# Altium PCB PCB3.PcbDoc
Units mm, origin at the board's own origin, x right, y up, seen from the top; angles counter-clockwise.
Board outline 47.09 x 58.17 mm, 2 copper layers (Top Layer, Bottom Layer); 73 components, 59 nets, 332 pads, 45 vias.
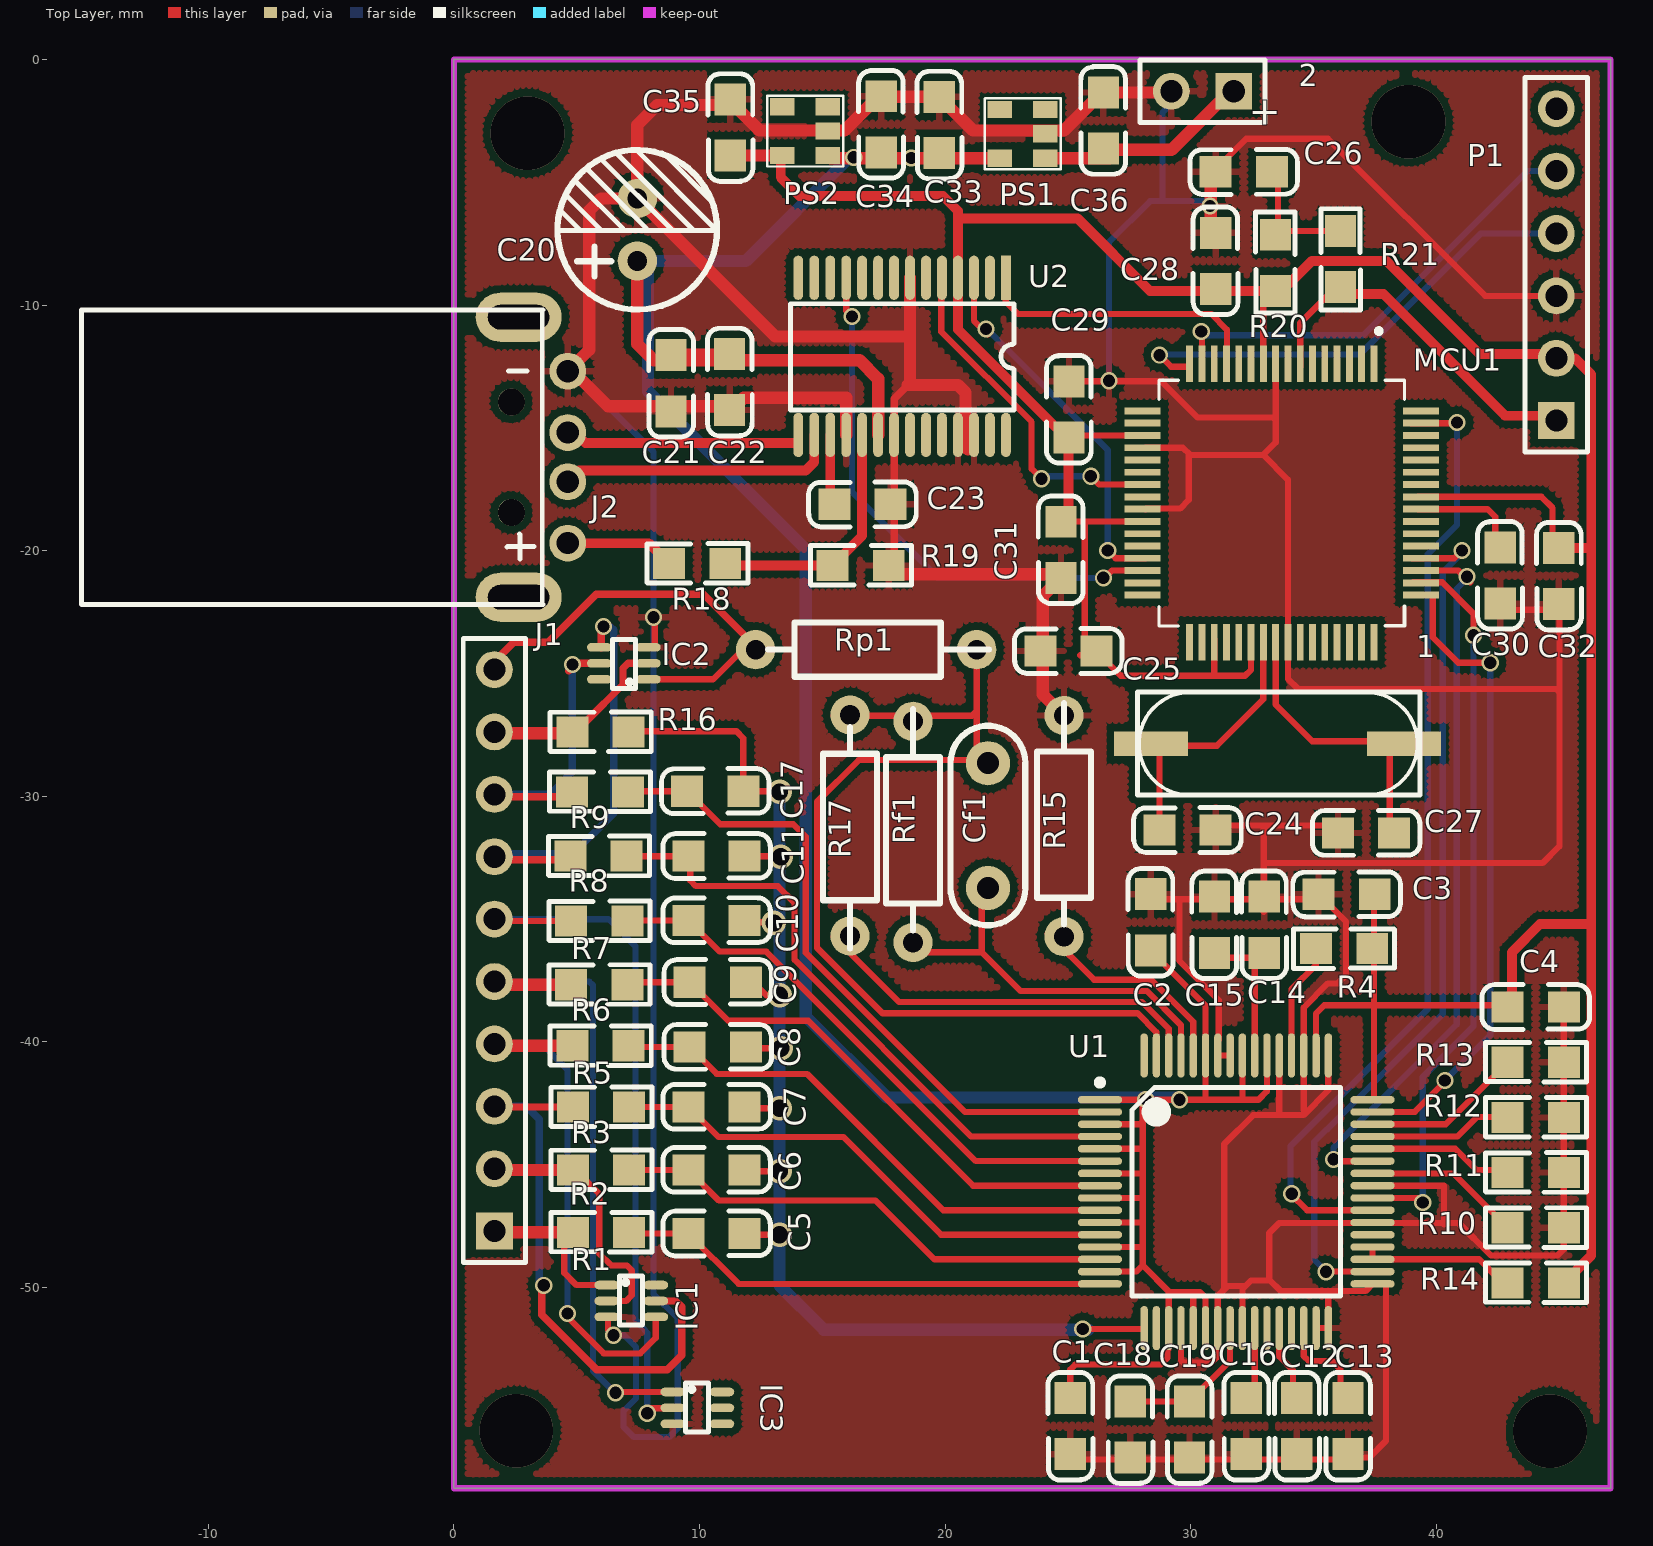
[diagram p0: Top Layer view]
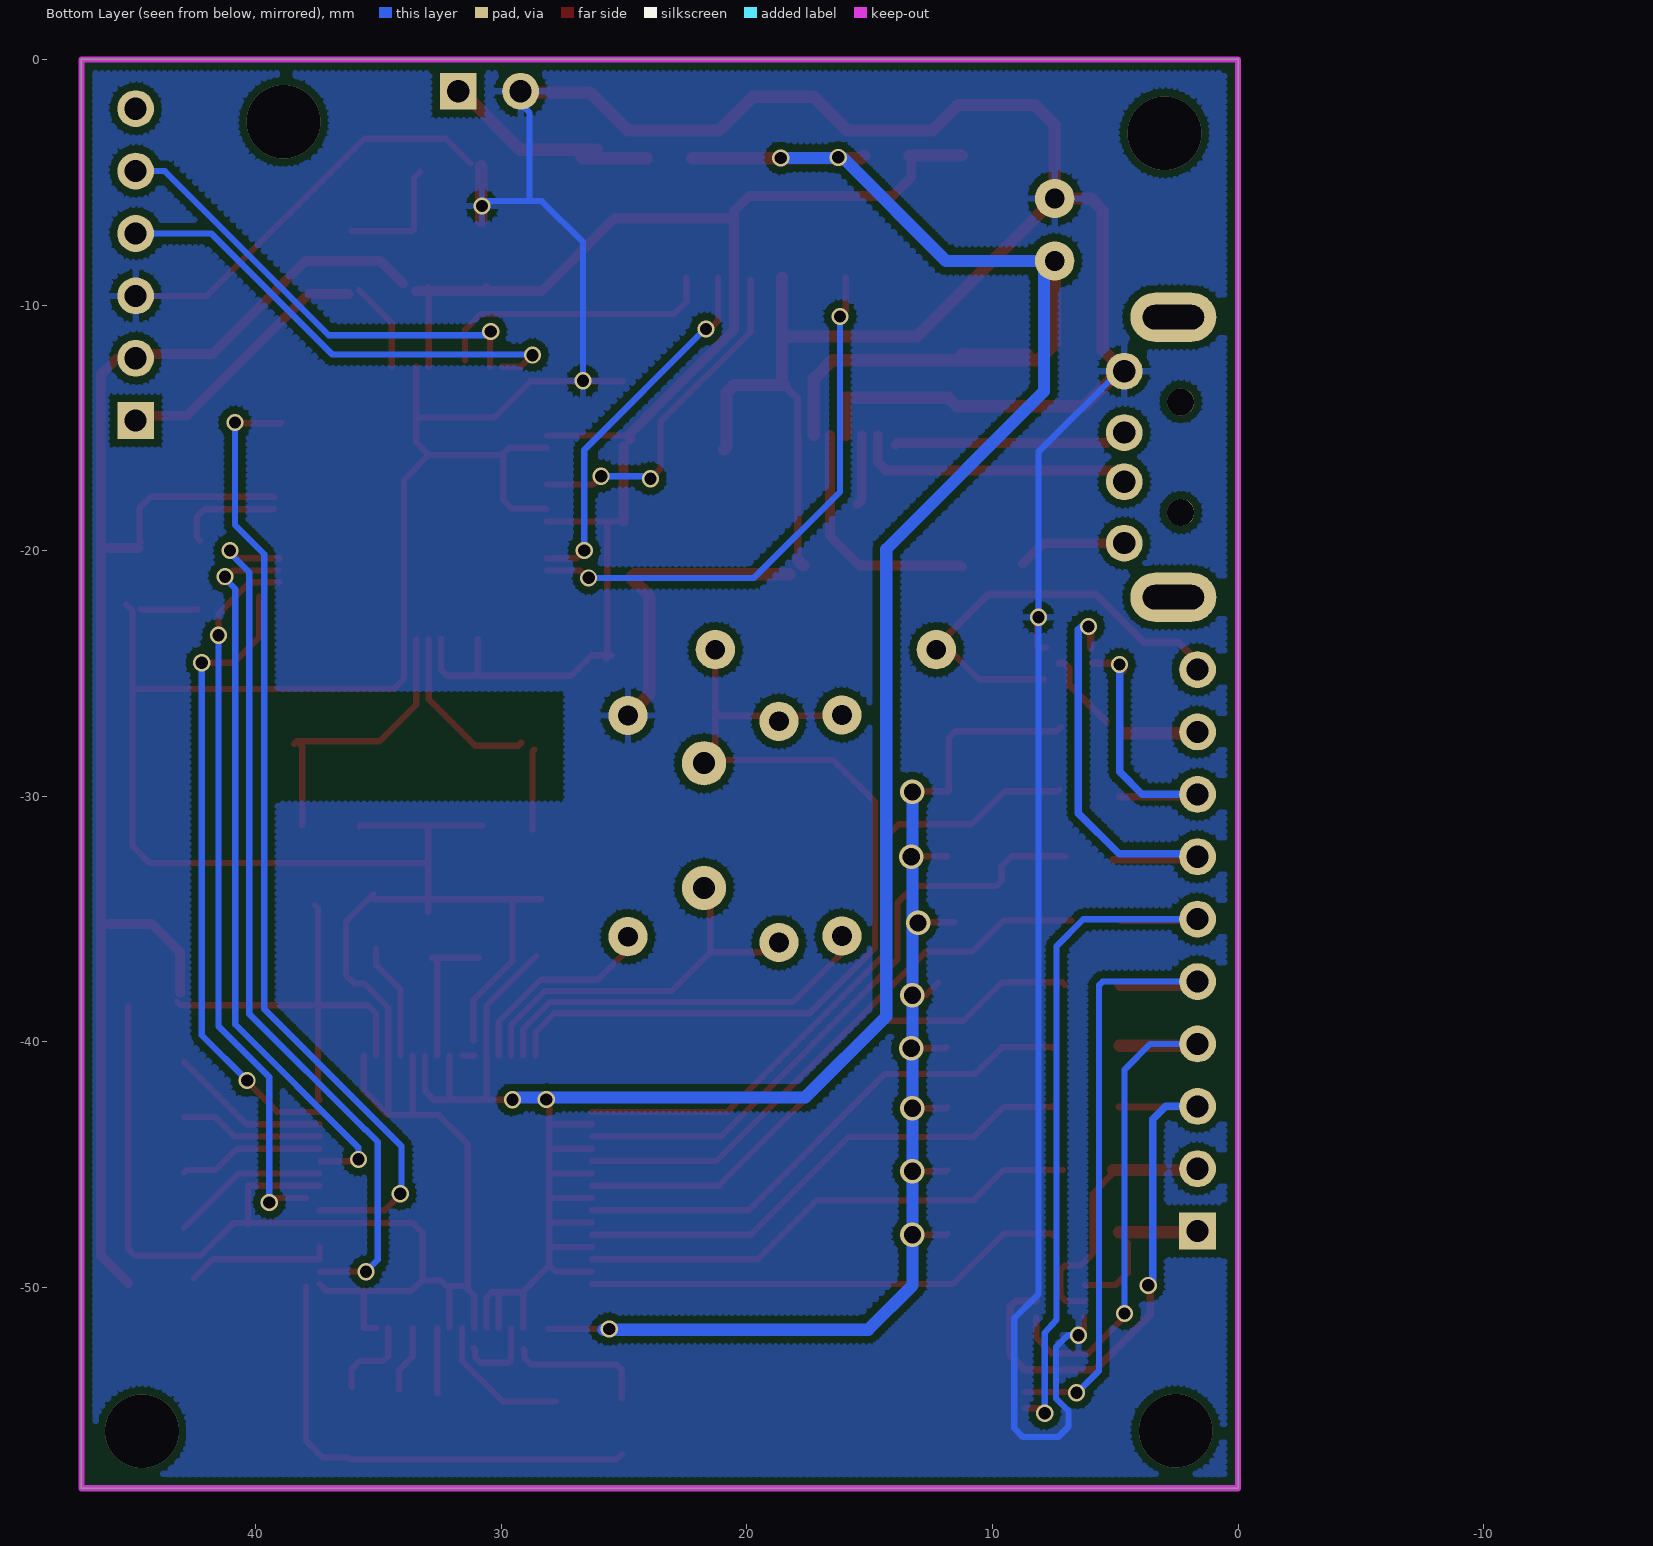
[diagram p1: Bottom Layer view, seen from below]

## Layer stack, top to bottom
Top Layer: signal copper 0.0356
Dielectric: dielectric 0.32, FR-4, Dk 4.8
Bottom Layer: signal copper 0.0356

## Board outline
0,0 46.863,0 47.092,0 47.092,-58.166 0,-58.166

## Design rules (kind name [scope] priority, off if disabled: settings)
Clearance Clearance_1 [(InPolygon)] p1: gap=0.3
Clearance [All] p2: gap=0.2
ComponentClearance [All] p1 off: gap=0.254 collisioncheckmode=3 verticalgap=0.254
PolygonConnect [All] p1: connectstyle=Relief reliefconductorwidth=0.254 reliefentries=4 polygonreliefangle="90 Angle"
RoomDefinition ADS1299 [InComponentClass('ADS1299')] p1: confinementstyle=ConfineOut formatcopy=TRUE lockcomponents=FALSE outline 16.662,-82.347 36.601,-82.347 36.601,-64.567 16.662,-64.567
RoomDefinition MCU [InComponentClass('MCU')] p2: confinementstyle=ConfineOut formatcopy=TRUE lockcomponents=FALSE outline -7.595,-84.633 12.852,-84.633 12.852,-61.773 -7.595,-61.773
RoomDefinition Power [InComponentClass('Power')] p3: confinementstyle=ConfineOut formatcopy=TRUE lockcomponents=FALSE outline 37.998,-75.87 66.573,-75.87 66.573,-69.012 37.998,-69.012
RoutingVias [All] p1: holewidth=0.711 width=1.27 viastyle="Through Hole" minholewidth=0.3 minwidth=0.3 maxholewidth=4 maxwidth=4
SolderMaskExpansion [All] p1: expansion=0.102
TestPointUsage [All] p1: valid=0 allowmultiple=FALSE
Testpoint [All] p1: side=15 testpointundercomponent=TRUE minsize=1.016 maxsize=2.54 preferedsize=1.524 minholesize=0 maxholesize=1.016 preferedholesize=0.813 testpointgrid=0.025 style=1023 order=0-112345678
Width [All] p1: maxlimit=3 minlimit=0.254 preferedwidth=0.254 minimp=50.000000 maximp=50.000000 favimp=50.000000
18 further rules are at their usual default settings.

## Classes and differential pairs
component class ADS1299: C1 C2 C3 C4 C5 C6 C7 C8 C9 C10 C11 C12 C13 C14 C15 C16 C17 C18 C19 Cf1 IC1 IC2 IC3 J1 R1 R2 R3 R4 R5 R6 R7 R8 R9 R10 R11 R12 R13 R14 R15 R16 R17 Rf1 Rp1 U1
component class MCU: 1 C20 C21 C22 C23 C24 C25 C26 C27 C28 C29 C30 C31 C32 J2 MCU1 P1 R18 R19 R20 R21 U2
component class Power: 2 C33 C34 C35 C36 PS1 PS2

## Components (designator, comment, footprint, x,y, rotation, side; value= is the part's Value field where it differs from the comment)
1 "ECS-250-18-5PX-F-TR" XTAL/S 30.35,-28.396 r0 top
2 "Battery" BAT-2 30.48,-1.295 r180 top
C1 "Cap Semi" 0805c 25.095,-56.783 r90 top
C2 "Cap Semi" 0805c 28.372,-33.985 r270 top
C3 "Cap Semi" 0805c 35.204,-33.985 r0 top
C4 "Cap Semi" 0805c 45.187,-38.583 r180 top
C5 "Cap Semi" 0805c 11.836,-47.803 r180 top
C6 "Cap Semi" 0805c 11.836,-45.212 r180 top
C7 "Cap Semi" 0805c 11.836,-42.647 r180 top
C8 "Cap Semi" 0805c 11.887,-40.208 r180 top
C9 "Cap Semi" 0805c 11.887,-37.567 r180 top
C10 "Cap Semi" 0805c 11.836,-35.052 r180 top
C11 "Cap Semi" 0805c 11.836,-32.436 r180 top
C12 "Cap Semi" 0805c 34.315,-56.783 r90 top
C13 "Cap Semi" 0805c 36.398,-56.783 r90 top
C14 "Cap Semi" 0805c 32.995,-34.087 r270 top
C15 "Cap Semi" 0805c 30.963,-34.087 r270 top
C16 "Cap Semi" 0805c 32.258,-56.783 r90 top
C17 "Cap Semi" 0805c 11.786,-29.794 r180 top
C18 "Cap Semi" 0805c 27.534,-56.921 r90 top
C19 "Cap Semi" 0805c 29.947,-56.921 r90 top
C20 "Cap Pol2" φ6.5-1 7.468,-8.204 r90 top
C21 "Cap Semi" 0805c 8.839,-14.326 r90 top
C22 "Cap Semi" 0805c 11.227,-14.275 r90 top
C23 "Cap Semi" 0805c 15.494,-18.11 r0 top
C24 "Cap Semi" 0805c 28.727,-31.369 r0 top
C25 "Cap Semi" 0805c 23.876,-24.079 r0 top
C26 "Cap Semi" 0805c 31.013,-4.572 r0 top
C27 "Cap Semi" 0805c 38.278,-31.496 r180 top
C28 "Cap Semi" 0805c 31.013,-7.061 r270 top
C29 "Cap Semi" 0805c 25.044,-13.106 r270 top
C30 "Cap Semi" 0805c 42.596,-19.863 r270 top
C31 "Cap Semi" 0805c 24.714,-18.821 r270 top
C32 "Cap Semi" 0805c 44.983,-22.174 r90 top
C33 "Cap Semi" 0805c 19.761,-3.81 r90 top
C34 "Cap Semi" 0805c 17.399,-1.499 r270 top
C35 "Cap Semi" 0805c 11.252,-3.912 r90 top
C36 "Cap Semi" 0805c 26.441,-1.346 r270 top
Cf1 "Cap" 102 21.742,-28.651 r90 top
IC1 "TPD4E1B06DCKR" SOT363 6.223,-49.896 r270 top
IC2 "TPD4E1B06DCKR" SOT363 7.918,-25.237 r90 top
IC3 "TPD4E1B06DCKR" SOT363 8.915,-54.25 r270 top
J1 "MMS-110-01-T-SV" HDR1X10 1.651,-47.701 r90 top
J2 "629004113921" USB-公头 3.487,-16.195 r180 top
MCU1 "PIC32MX470F512H-I/PT" *QFP50P1200X1200X120-64N 33.706,-18.059 r270 top locked
P1 "Header 6" HDR1X6 44.882,-14.707 r90 top
PS1 "MCP1754T-3302E_OT" SOT23-5 23.153,-3.034 r90 top
PS2 "MCP1754T-3302E_OT" SOT23-5 14.3,-2.921 r90 top
R1 "Res3" 0805 7.137,-47.752 r180 top
R2 "Res3" 0805 7.137,-45.212 r180 top
R3 "Res3" 0805 7.137,-42.647 r180 top
R4 "Res3" 0805 35.103,-36.195 r0 top
R5 "Res3" 0805 7.112,-40.157 r180 top
R6 "Res3" 0805 7.061,-37.668 r180 top
R7 "Res3" 0805 7.061,-35.077 r180 top
R8 "Res3" 0805 7.036,-32.436 r180 top
R9 "Res3" 0805 7.087,-29.82 r180 top
R10 "Res3" 0805 45.187,-47.564 r180 top
R11 "Res3" 0805 45.187,-45.319 r180 top
R12 "Res3" 0805 45.187,-43.073 r180 top
R13 "Res3" 0805 45.187,-40.828 r180 top
R14 "Res3" 0805 45.187,-49.809 r180 top
R15 "Res1" "RB0.4    &9" 24.841,-26.712 r270 top
R16 "Res3" 0805 7.112,-27.381 r180 top
R17 "Res1" "RB0.4    &9" 16.129,-35.687 r90 top
R18 "Res3" 0805 11.049,-20.523 r180 top
R19 "Res3" 0805 17.704,-20.599 r180 top
R20 "Res3" 0805 33.452,-7.137 r270 top
R21 "Res3" 0805 36.093,-9.271 r90 top
Rf1 "Res1" "RB0.4    &9" 18.694,-26.949 r270 top
Rp1 "Res1" "RB0.4    &9" 21.285,-24.028 r180 top
U1 "ADS1299IPAGR" TQFP64_N 31.852,-46.101 r0 top
U2 "FT232RL-Tray" SSOP-28 22.472,-8.89 r180 top

## Footprints (in the part's own frame and the unit in brackets; to place one, negate y for a bottom-side part, rotate by r counter-clockwise, add the part's x,y. Pads: shape width x height; smd on the part's side, far side on the other; paste and mask are expansions set on the pad)
102 [mm]
  round 1.8 hole 0.9: 1(0,0) 2(-5.08,0)
  silkscreen extent -6.6,-1.52 1.52,1.52
0805 [mm] "Chip Resistor; Body 2.0 x 1.3 mm (LxW typ)"
  rect 1.3x1.27 smd: 1(0,0) 2(2.286,0)
  silkscreen extent -0.92,-0.81 3.19,0.8
0805c [mm]
  rect 1.3x1.27 smd: 1(0,0) 2(2.286,0)
  silkscreen extent -1.05,-0.92 3.33,0.91
*QFP50P1200X1200X120-64N [mm]
  rect 1.47x0.28 smd: 1(-5.67,3.75) 2(-5.67,3.25) 3(-5.67,2.75) 4(-5.67,2.25) 5(-5.67,1.75) 6(-5.67,1.25) 7(-5.67,0.75) 8(-5.67,0.25) 9(-5.67,-0.25) 10(-5.67,-0.75) 11(-5.67,-1.25) 12(-5.67,-1.75) 13(-5.67,-2.25) 14(-5.67,-2.75) 15(-5.67,-3.25) 16(-5.67,-3.75) 33(5.67,-3.75) 34(5.67,-3.25) 35(5.67,-2.75) 36(5.67,-2.25) 37(5.67,-1.75) 38(5.67,-1.25) 39(5.67,-0.75) 40(5.67,-0.25) 41(5.67,0.25) 42(5.67,0.75) 43(5.67,1.25) 44(5.67,1.75) 45(5.67,2.25) 46(5.67,2.75) 47(5.67,3.25) 48(5.67,3.75)
  rect 0.28x1.47 smd: 17(-3.75,-5.67) 18(-3.25,-5.67) 19(-2.75,-5.67) 20(-2.25,-5.67) 21(-1.75,-5.67) 22(-1.25,-5.67) 23(-0.75,-5.67) 24(-0.25,-5.67) 25(0.25,-5.67) 26(0.75,-5.677) 27(1.25,-5.67) 28(1.75,-5.67) 29(2.25,-5.67) 30(2.75,-5.67) 31(3.25,-5.67) 32(3.75,-5.67) 49(3.75,5.67) 50(3.25,5.67) 51(2.75,5.67) 52(2.25,5.67) 53(1.75,5.67) 54(1.25,5.67) 55(0.75,5.67) 56(0.25,5.67) 57(-0.25,5.67) 58(-0.75,5.67) 59(-1.25,5.67) 60(-1.75,5.67) 61(-2.25,5.67) 62(-2.75,5.67) 63(-3.25,5.67) 64(-3.75,5.67)
  silkscreen extent -7.1,-5 5,5
BAT-2 [mm] "Multicell Battery; 2 Leads"
  rect 1.5x1.5 hole 0.9: 1(-1.27,0)
  round 1.5 hole 0.9: 2(1.27,0)
  silkscreen extent -2.54,-1.27 2.54,1.27
HDR1X6 [mm]
  rect 1.5x1.5 hole 0.9: 1(0,0)
  round 1.5 hole 0.9: 2(2.54,0) 3(5.08,0) 4(7.62,0) 5(10.16,0) 6(12.7,0)
  silkscreen extent -1.27,-1.27 13.97,1.27
HDR1X10 [mm]
  rect 1.5x1.5 hole 0.9: 1(0,0)
  round 1.5 hole 0.9: 2(2.54,0) 3(5.08,0) 4(7.62,0) 5(10.16,0) 6(12.7,0) 7(15.24,0) 8(17.78,0) 9(20.32,0) 10(22.86,0)
  silkscreen extent -1.27,-1.27 24.13,1.27
"RB0.4    &9" [mm]
  round 1.6 hole 0.8: 1(0,0) 2(9,0)
  silkscreen extent -0.5,-1.1 8.5,1.1
SOT23-5 [mm]
  rect 0.7x1 smd: 1(-0.99,-0.924) 2(0.011,-0.926) 3(0.99,-0.924) 4(0.99,0.927) 5(-0.99,0.927)
  silkscreen extent -1.44,-1.56 1.45,1.53
SOT363 [mm]
  oval 0.35x1 smd: 1(0,0) 2(0.65,0) 3(1.3,0) 4(1.3,2) 5(0.65,2) 6(0,2)
  silkscreen extent -0.37,0.52 1.63,1.46
SSOP-28 [mm]
  rect 0.4x1.8 smd: 1(0,0)
  oval 0.4x1.8 smd: 2(0.65,0) 3(1.3,0) 4(1.95,0) 5(2.6,0) 6(3.25,0) 7(3.9,0) 8(4.55,0) 9(5.2,0) 10(5.85,0) 11(6.5,0) 12(7.15,0) 13(7.8,0) 14(8.45,0) 15(8.45,6.4) 16(7.8,6.4) 17(7.15,6.4) 18(6.5,6.4) 19(5.85,6.4) 20(5.2,6.4) 21(4.55,6.4) 22(3.9,6.4) 23(3.25,6.4) 24(2.6,6.4) 25(1.95,6.4) 26(1.3,6.4) 27(0.65,6.4) 28(0,6.4)
  silkscreen extent -0.32,1.06 8.78,5.38
TQFP64_N [mm]
  oval 1.8x0.3 smd: 1(-5.55,3.75) 2(-5.55,3.25) 3(-5.55,2.75) 4(-5.55,2.25) 5(-5.55,1.75) 6(-5.55,1.25) 7(-5.55,0.75) 8(-5.55,0.25) 9(-5.55,-0.25) 10(-5.55,-0.75) 11(-5.55,-1.25) 12(-5.55,-1.75) 13(-5.55,-2.25) 14(-5.55,-2.75) 15(-5.55,-3.25) 16(-5.55,-3.75) 33(5.55,-3.75) 34(5.55,-3.25) 35(5.55,-2.75) 36(5.55,-2.25) 37(5.55,-1.75) 38(5.55,-1.25) 39(5.55,-0.75) 40(5.55,-0.25) 41(5.55,0.25) 42(5.55,0.75) 43(5.55,1.25) 44(5.55,1.75) 45(5.55,2.25) 46(5.55,2.75) 47(5.55,3.25) 48(5.55,3.75)
  oval 0.3x1.8 smd: 17(-3.75,-5.55) 18(-3.25,-5.55) 19(-2.75,-5.55) 20(-2.25,-5.55) 21(-1.75,-5.55) 22(-1.25,-5.55) 23(-0.75,-5.55) 24(-0.25,-5.55) 25(0.25,-5.55) 26(0.75,-5.55) 27(1.25,-5.55) 28(1.75,-5.55) 29(2.25,-5.55) 30(2.75,-5.55) 31(3.25,-5.55) 32(3.75,-5.55) 49(3.75,5.55) 50(3.25,5.55) 51(2.75,5.55) 52(2.25,5.55) 53(1.75,5.55) 54(1.25,5.55) 55(0.75,5.55) 56(0.25,5.55) 57(-0.25,5.55) 58(-0.75,5.55) 59(-1.25,5.55) 60(-1.75,5.55) 61(-2.25,5.55) 62(-2.75,5.55) 63(-3.25,5.55) 64(-3.75,5.55)
  silkscreen extent -5.67,-4.25 4.25,4.57
USB-公头 [mm]
  oval 3.5x2 hole 1 slot 2.5 at 0 deg: 0(0.85,5.7) 0(0.85,-5.7)
  round 1.1 hole 1.1: 0(1.15,2.25) 0(1.15,-2.25)
  round 1.5 hole 0.9: 1(-1.15,3.5) 2(-1.15,1) 3(-1.15,-1) 4(-1.15,-3.5)
  silkscreen extent -0.15,-6 18.65,6
XTAL/S [mm]
  rect 3x1 smd: 1(8.334,0.532) 2(-1.966,0.532)
  silkscreen extent -2.52,-1.57 8.98,2.64
φ6.5-1 [mm]
  round 1.6 hole 0.8: 1(0,0) 2(2.54,0)
  silkscreen extent -1.98,-3.27 4.52,3.25

## Part data
1: library part CMP-2000-05725-1, "Low Profile Crystal, 14.7456 MHz, 18 pF, -20 to 70 degC, 2-Pin SMD, RoHS, Tape and Reel"
2: "Multicell Battery"
C1 C2 C3 C4 C5 C6 C7 C8 C9 C10 C11 C12 C13 C14 C15 C16 C17 C18 C19 C21 C22 C23 C24 C25 C26 C27 C28 C29 C30 C31 C32 C33 C34 C35 C36: "Capacitor (Semiconductor SIM Model)"
C20: "Polarized Capacitor (Axial)"
Cf1: "Capacitor"
IC1 IC2 IC3: "Integrated Circuit"
J1: library part CMP-1022-00092-1, "Tiger Claw(TM) Socket Strip, Through-hole, Vertical, -55 to 105 degC, 2 mm Pitch, 10-Pin, Female, RoHS"
J2: library part CMP-1502-03242-1, "USB 2.0 Type A Plug WR-COM, Horizontal, SMT, with Clips"
P1: "Header, 6-Pin"
PS1 PS2: "Power Supply"
R1 R2 R3 R4 R5 R6 R7 R8 R9 R10 R11 R12 R13 R14 R15 R16 R17 R18 R19 R20 R21 Rf1 Rp1: "Resistor"
U1: library part CMP-0841-00001-2, "Low-Noise, 8-Channel, 24-Bit Analog Front-End for Biopotential Measurement, 16 KSPS, -40 to 85 degC, 64-Pin PQFP (PAG-64), RoHS, Tape and Reel"
U2: library part CMP-0078-00027-1, "USB UART Asynchronous Serial Data Transfer Chip, SSOP-28, Tray"

## Via types
v1: diameter 0.7, hole 0.5, Top Layer to Bottom Layer, 33 vias
v2: diameter 1, hole 0.7, Top Layer to Bottom Layer, 8 vias
v3: diameter 3, hole 3, Top Layer to Bottom Layer, 4 vias

## Nets (pads, with @x,y where several pads share a name; then routed paths per layer and width w, separated by ;. In a path a pad name is that pad's centre, name@x,y a point inside that pad or via, vN(x,y) a via of type N, cw(c..) or ccw(c..) an arc to the next point about the centre after c; other vN are vias at no path point)
+3.3: C3.2 C4.2 C25.2 C28.2 C29.2 C31.1 C32.2 C35.1 MCU1.10 MCU1.19 MCU1.26 MCU1.35 MCU1.38 MCU1.57 P1.2 PS2.5 R4.2 R14.1 R20.2 U1.48 U1.50 U2.4 | length 147.5
  Top Layer w0.254: 20.379,-6.028 20.447,-6.096 ; C29.2@24.867,-15.367 24.924,-15.309 MCU1.19@28.156,-15.309 ; C31.1@25.273,-18.796 25.286,-18.809 MCU1.26@28.156,-18.809 ; 25.502,-24.257 26.314,-24.257 27.153,-25.095 32.207,-25.095 32.456,-24.847 MCU1.38@32.456,-23.609 ; 25.679,-18.809 25.679,-24.359 C25.2@25.73,-24.409 ; C28.2@30.607,-9.22 C28.2@30.658,-9.271 ; MCU1.35@30.956,-23.609 30.956,-25.063 30.988,-25.095 ; MCU1.10@32.956,-12.509 32.956,-9.284 R20.2@32.969,-9.271 ; U1.50 35.102,-38.838 35.433,-38.506 C4.2@42.901,-38.506 ; U1.48 37.465,-42.288 37.465,-34.544 C3.2@37.592,-34.417 ; MCU1.57@39.256,-17.809 44.276,-17.809 44.729,-18.263 44.729,-19.609 C32.2@44.679,-19.66 ; C4.2@43.053,-38.506 C4.2@43.205,-38.354
  Top Layer w0.4: PS2.5 13.31,-3.975 13.31,-4.801 14.072,-5.563 19.914,-5.563 20.379,-6.028 ; 20.447,-6.096 20.522,-6.171 20.522,-10.997 24.752,-15.227 C29.2@24.752,-15.481 ; 20.522,-6.477 25.4,-6.477 28.346,-9.423 R20.2@33.477,-9.423 ; C31.1@25.019,-18.821 C29.2@25.019,-15.748 ; R20.2@34.011,-9.119 34.925,-8.204 37.973,-8.204 41.758,-11.989 P1.2@44.882,-11.989 ; C4.2@43.053,-37.998 43.078,-37.973 43.078,-36.347 44.221,-35.204 46.304,-35.204 ; C32.2@44.755,-19.888 46.279,-19.888 46.304,-19.914 ; R14.1 46.304,-48.692 46.304,-12.827 45.644,-12.167
  Top Layer w0.5: C35.1 PS2.5
+5: C1.2 C2.2 C20.1 C21.2 C22.2 C33.1 C34.2 PS1.5 PS2.1 U1.1 U1.3 U1.5 U1.7 U1.9 U1.11 U1.13 U1.15 U1.19 U1.21 U1.22 U1.54 U1.56 U1.59 U2.20 | length 137.8
  Top Layer w0.254: C1.2 25.095,-53.34 25.298,-53.137 28.778,-53.137 29.058,-52.857 29.058,-52.541 U1.19@29.083,-52.516 ; U1.15 27.789,-49.351 28.042,-49.098 ; U1.13 27.955,-48.351 28.042,-48.438 ; U1.11 28.011,-47.351 28.042,-47.32 ; U1.9 28.012,-46.351 28.042,-46.38 ; U1.7 27.979,-45.351 28.042,-45.288 ; U1.5 28.019,-44.351 28.042,-44.374 ; U1.3 27.921,-43.351 28.042,-43.231 ; U1.1 32.757,-42.351 33.102,-42.006 U1.54 ; v1@28.042,-42.351 28.042,-49.098 ; C2.2@28.575,-36.5 30.602,-38.526 30.602,-42.295 30.658,-42.351 ; U1.19 29.102,-50.223 29.134,-50.19 ; U1.21 30.102,-50.289 30.201,-50.19 ; U1.22 30.602,-50.414 30.378,-50.19 29.134,-50.19 ; U1.56 32.102,-42.271 32.182,-42.351 ; 28.042,-49.098 29.134,-50.19
  Top Layer w0.5: C20.1 7.468,-11.582 8.128,-12.243 16.51,-12.243 17.272,-13.005 U2.20 ; C21.2@8.585,-12.014 11.201,-12.014 C22.2 ; PS2.1 15.337,-4.024 PS1.5
  Bottom Layer w0.5: C20.1 11.887,-8.204 16.078,-4.013 v1(18.618,-4.013) v1@18.644,-4.039 ; C20.1@7.899,-8.204 7.899,-13.513 14.326,-19.939 14.326,-38.964 17.628,-42.266 v1@29.515,-42.266
  other v1: 28.169,-42.342 29.54,-42.351 16.281,-3.988
DRDY: MCU1.49 U1.47 | length 25.8
  Top Layer w0.254: U1.47 39.115,-42.851 v1@40.425,-41.541 ; MCU1.49@39.853,-21.869 39.853,-23.52 40.894,-24.562 v1(42.189,-24.562)
  Bottom Layer w0.254: v1(40.346,-41.569) 42.189,-39.726 v1(42.189,-24.562)
GND: 2.2 C1.1 C2.1 C3.1 C4.1 C12.1 C13.1 C14.1 C15.1 C16.1 C18.1 C19.1 C20.2 C21.1 C22.1 C23.2 C24.2 C25.1 C26.1 C27.2 C28.1 C29.1 C30.2 C31.2 C32.1 C33.2 C34.1 C35.2 C36.1 IC1.3 IC2.3 IC3.3 J2.4 MCU1.9 MCU1.20 MCU1.25 MCU1.41 P1.3 PS1.2 PS2.2 R10.1 R11.1 R12.1 R13.1 R15.1 R19.1 U1.20 U1.23 U1.25 U1.31 U1.32 U1.33 U1.38 U1.41 U1.49 U1.51 U1.53 U1.57 U1.58 U2.7 U2.18 U2.21 U2.25 U2.26 | length 359.1
  Top Layer w0.254: IC1.3@6.274,-51.196 6.274,-51.714 v1(6.502,-51.943) ; IC2.3@7.813,-23.937 8.179,-23.937 8.179,-22.758 v1@8.153,-22.733 ; C29.1 28.804,-13.106 30.277,-14.58 33.354,-14.58 33.456,-14.681 ; C1.1 25.31,-56.998 36.144,-56.998 36.22,-56.921 37.262,-56.921 37.948,-56.236 U1.33@37.948,-49.962 ; MCU1.25@28.156,-18.309 28.177,-18.288 29.566,-18.288 29.921,-17.932 29.921,-16.053 ; MCU1.20@28.156,-15.809 29.678,-15.809 29.972,-16.104 32.944,-16.104 ; C2.1@28.372,-34.188 C3.1@35.204,-34.188 ; 29.54,-34.188 29.54,-36.703 31.14,-38.303 31.14,-39.929 U1.58@31.115,-39.954 ; U1.20 29.602,-52.97 29.693,-53.061 30.836,-53.061 31.064,-52.832 31.064,-52.517 U1.23@31.115,-52.467 ; C24.2@30.759,-31.191 35.738,-31.191 C27.2@35.763,-31.217 ; U1.23 31.102,-50.331 31.496,-49.936 32.233,-49.936 ; U1.58 U1.57 ; C26.1@31.242,-4.242 32.258,-3.226 35.585,-3.226 41.986,-9.627 P1.3 ; 31.359,-50.073 31.359,-44.155 32.537,-42.977 34.595,-42.977 35.602,-41.97 U1.49 ; U1.25 32.102,-50.067 32.461,-49.708 33.172,-49.708 33.198,-49.682 ; C14.1@32.969,-34.696 32.969,-31.318 33.096,-31.191 ; 32.969,-32.715 44.323,-32.715 45.009,-32.029 45.009,-22.454 C32.1@45.263,-22.2 ; MCU1.9@33.456,-12.509 33.456,-15.592 32.944,-16.104 ; 33.602,-42.977 U1.53 ; 34.602,-42.774 34.602,-38.601 35.585,-37.617 35.992,-37.617 36.322,-37.287 36.322,-35.103 C3.1 ; U1.31 U1.32 35.602,-50.174 35.636,-50.14 ; U1.33 37.113,-50.14 33.655,-50.14 33.198,-49.682 ; U1.41 40.31,-45.851 40.31,-47.422 ; C30.2@42.367,-22.403 44.653,-22.403 C32.1@44.679,-22.377 ; 45.009,-25.756 44.882,-25.629 34.366,-25.629 33.956,-25.218 33.956,-17.116 32.944,-16.104 ; C4.1 45.187,-48.438 44.933,-48.692 42.222,-48.692 40.901,-47.371 33.604,-47.371 33.198,-47.777 33.198,-49.682
  Top Layer w0.3: R19.1@17.922,-20.381 17.922,-13.818 18.481,-13.259
  Top Layer w0.5: J2.4 5.512,-11.82 5.512,-6.147 5.994,-5.664 C20.2 ; J2.4@5.004,-12.852 6.274,-14.122 11.455,-14.122 11.806,-13.771 15.972,-13.771 U2.18 ; R19.1 R19.1@17.922,-20.381 ; R19.1@18.263,-20.955 24.562,-20.955 C31.2 23.978,-21.844 23.978,-25.849 R15.1 ; 18.481,-13.259 20.523,-13.259 20.828,-13.564 20.828,-15.773 20.93,-15.875 ; 18.572,-11.278 13.081,-11.278 C20.2 ; U2.7 18.572,-13.238 18.593,-13.259 ; 2.2@29.439,-1.372 29.413,-1.346 26.391,-1.346 24.841,-2.896 21.133,-2.896 C33.2 17.272,-1.524 15.9,-2.896 12.446,-2.896 11.405,-1.854 8.28,-1.854 7.468,-2.667 C20.2 ; C28.1@30.81,-6.579 C26.1@30.81,-4.343
  Bottom Layer w0.254: J2.4@4.928,-12.776 8.128,-15.977 8.128,-50.267 9.119,-51.257 9.119,-55.728 8.763,-56.083 7.315,-56.083 6.909,-55.677 6.909,-55.016 7.42,-54.505 7.42,-52.429 6.934,-51.943 v1(6.502,-51.943) ; v1(26.67,-13.081) 26.67,-7.442 28.346,-5.766 30.582,-5.766 v1(30.785,-5.969) ; 28.854,-5.766 28.854,-2.159 2.2@29.362,-1.651
  other v1: 8.128,-22.708
MCLR: MCU1.7 P1.1 R21.1 | length 14.5
  Top Layer w0.254: MCU1.7@34.456,-12.509 34.456,-10.731 R21.1@35.789,-9.398
  Top Layer w0.4: R21.1@36.22,-9.55 37.846,-9.55 42.799,-14.503 44.679,-14.503 P1.1
MCU_SDI: MCU1.51 U1.43 | length 30
  Top Layer w0.254: v1@35.814,-44.856 U1.43@37.338,-44.856 ; MCU1.51@39.065,-20.809 40.901,-20.809 v1@41.377,-21.285
  Bottom Layer w0.254: v1(35.814,-44.78) 35.814,-44.298 40.825,-39.287 40.825,-21.557 v1@41.288,-21.095
  other v1: 41.25,-21.057
MCU_SDO: MCU1.52 U1.34 | length 36.1
  Top Layer w0.254: v1(35.509,-49.352) U1.34 ; MCU1.52@39.014,-20.309 40.727,-20.309 v1(41.046,-19.99)
  Bottom Layer w0.254: v1(35.509,-49.352) 35.027,-48.87 35.027,-44.069 35.535,-43.561 35.56,-43.561 40.259,-38.862 40.259,-20.879 41.046,-20.091 v1(41.046,-19.99)
MCU_SS: MCU1.63 U1.39 | length 39.7
  Top Layer w0.254: v1@34.061,-46.177 34.735,-46.851 U1.39 ; MCU1.63@38.964,-14.809 v1@40.843,-14.809
  Bottom Layer w0.254: v1@34.061,-46.177 34.061,-44.247 39.649,-38.659 39.649,-20.142 40.843,-18.948 v1(40.843,-14.783)
  other v1: 34.112,-46.177
Net1_1: 1.1 C27.1 MCU1.40 | length 11.8
  Top Layer w0.254: MCU1.40@33.456,-23.609 33.456,-26.268 34.95,-27.762 1.1@38.329,-27.762 ; C27.1@38.1,-31.191 38.1,-27.991 1.1@38.329,-27.762 ; 1.1@38.43,-27.864 1.1@38.329,-27.762
Net1_2: 1.2 C24.1 MCU1.39 | length 10.4
  Top Layer w0.254: 1.2@28.651,-28.092 28.727,-28.169 C24.1 ; 1.2@29.185,-27.813 29.312,-27.94 31.064,-27.94 32.956,-26.048 MCU1.39@32.956,-23.609
Net2_1: 2.1 C36.2 PS1.1 | length 9.3
  Top Layer w0.5: PS1.1 26.685,-4.024 C36.2@26.721,-3.988 ; C36.2@26.111,-3.683 29.21,-3.683 31.598,-1.295 2.1
NetC5_1: C5.1 C6.1 C7.1 C8.1 C9.1 C10.1 C11.1 C17.1 R16.1 U1.17 | length 54.2
  Top Layer w0.254: R16.1@7.214,-27.178 7.391,-27.356 11.506,-27.356 11.786,-27.635 C17.1 13.233,-29.794 v2(13.259,-29.82) ; C10.1@11.557,-35.128 13.005,-35.128 v2(13.03,-35.154) ; C5.1 11.887,-47.854 v2(13.259,-47.854) ; C6.1 11.887,-45.263 v2(13.259,-45.263) ; C7.1 11.887,-42.697 v2(13.259,-42.697) ; C11.1 v2@13.284,-32.436 ; C8.1 11.938,-40.259 v2(13.31,-40.259) ; C9.1@12.217,-37.592 12.725,-38.1 v2(13.259,-38.1) ; v1(25.603,-51.689) U1.17@28.067,-51.689
  Bottom Layer w0.5: v2(13.259,-29.82) 13.259,-49.911 15.062,-51.714 v1@25.832,-51.714
  other v2: 13.31,-32.461
NetC5_2: C5.2 R1.1 U1.16 | length 19.7
  Top Layer w0.254: R1.1@7.518,-47.879 7.595,-47.803 C5.2 11.599,-49.851 U1.16
NetC6_2: C6.2 R2.1 U1.14 | length 20.7
  Top Layer w0.254: R2.1 C6.2 10.795,-46.457 17.17,-46.457 19.565,-48.851 U1.14
NetC7_2: C7.2 R3.1 U1.12 | length 20.9
  Top Layer w0.254: R3.1@7.544,-42.621 7.569,-42.647 C7.2 10.77,-43.866 15.85,-43.866 19.835,-47.851 U1.12
NetC8_2: C8.2 R5.1 U1.10 | length 21.5
  Top Layer w0.254: R5.1@7.544,-40.234 7.569,-40.208 C8.2 10.693,-41.3 14.376,-41.3 19.927,-46.851 U1.10
NetC9_2: C9.2 R6.1 U1.8 | length 22.7
  Top Layer w0.254: R6.1 7.163,-37.567 C9.2 11.176,-39.141 14.427,-39.141 21.137,-45.851 U1.8
NetC10_2: C10.2 R7.1 U1.6 | length 23.6
  Top Layer w0.254: R7.1@6.782,-35.052 C10.2 10.82,-36.322 12.725,-36.322 21.254,-44.851 U1.6
NetC11_2: C11.2 R8.1 U1.4 | length 25.7
  Top Layer w0.254: R8.1 9.22,-32.436 9.627,-32.842 9.627,-33.426 9.855,-33.655 13.183,-33.655 13.872,-34.344 13.872,-36.655 21.067,-43.851 U1.4
NetC12_2: C12.2 U1.28 | length 2.7
  Top Layer w0.254: U1.28 33.602,-52.804 34.163,-53.365 34.163,-54.127 C12.2@34.138,-54.153
NetC13_2: C13.2 U1.30 | length 3.6
  Top Layer w0.254: U1.30 34.602,-52.788 34.798,-52.984 35.763,-52.984 36.093,-53.315 36.093,-54.026 C13.2@36.068,-54.051
NetC14_2: C14.2 C15.2 U1.55 | length 5.9
  Top Layer w0.254: C15.2@30.912,-36.576 C14.2@32.817,-36.576 ; U1.55 C14.2@32.602,-36.576
NetC16_2: C16.2 U1.26 | length 2.7
  Top Layer w0.254: C16.2@32.588,-54.305 32.602,-54.292 U1.26
NetC17_2: C17.2 R9.1 U1.2 | length 27.2
  Top Layer w0.254: R9.1@7.264,-29.718 7.341,-29.794 C17.2 10.846,-31.14 13.818,-31.14 14.326,-31.648 14.326,-36.373 20.804,-42.851 U1.2
NetC18_2: C18.2 C19.2 U1.24 | length 5.9
  Top Layer w0.254: C18.2@27.762,-54.635 C19.2 31.602,-52.98 U1.24
NetC23_1: C23.1 U2.17 | length 2.9
  Top Layer w0.4: U2.17 15.322,-17.938 C23.1
NetC26_2: C26.2 R20.1 R21.2 | length 5
  Top Layer w0.254: C26.2 33.553,-4.826 33.553,-6.909 33.63,-6.985 R21.2
NetC30_1: C30.1 MCU1.56 | length 4.3
  Top Layer w0.254: MCU1.56@39.256,-18.309 42.084,-18.309 42.393,-18.618 42.393,-19.456 C30.1@42.266,-19.583
NetCf1_1: Cf1.1 R17.2 Rf1.1 Rp1.1 U1.63 | length 39.8
  Top Layer w0.254: R17.2@15.469,-26.721 21.082,-26.721 21.285,-26.518 ; Cf1.1@21.006,-28.524 16.485,-28.524 14.783,-30.226 14.783,-36.17 17.45,-38.837 27.836,-38.837 28.602,-39.603 U1.63 ; Cf1.1@21.031,-28.727 21.285,-28.473 Rp1.1
NetCf1_2: Cf1.2 Rf1.2 U1.61 | length 15.9
  Top Layer w0.254: Rf1.2@18.39,-36.22 18.517,-36.347 21.488,-36.347 ; Cf1.2@21.285,-34.29 21.488,-34.493 21.488,-36.347 ; U1.61 29.602,-39.319 28.205,-37.922 23.063,-37.922 21.488,-36.347
NetIC1_1: IC1.1 J1.1 R1.2 | length 6.6
  Top Layer w0.254: R1.2@4.648,-48.031 4.496,-48.184 4.496,-49.403 4.989,-49.896 IC1.1
  Top Layer w0.5: J1.1 1.702,-47.752 R1.2
NetIC1_2: IC1.2 J1.2 R2.2 | length 11
  Top Layer w0.254: R2.2@4.953,-45.212 5.918,-46.177 5.918,-48.616 6.401,-49.098 7.036,-49.098 7.239,-49.301 7.239,-50.317 7.01,-50.546 IC1.2
  Top Layer w0.5: J1.2 1.702,-45.212 R2.2@5.08,-45.212
NetIC1_4: IC1.4 J1.4 R5.2 | length 21.7
  Top Layer w0.254: v1@4.547,-51.13 6.096,-52.68 7.595,-52.68 8.223,-52.051 IC1.4
  Top Layer w0.5: J1.4@1.93,-40.132 1.956,-40.157 R5.2
  Bottom Layer w0.254: J1.4 3.581,-40.081 4.623,-41.123 v1(4.623,-51.054)
NetIC1_5: IC1.5 J1.3 R3.2 | length 23.4
  Top Layer w0.3: J1.3 1.676,-42.647 R3.2 ; v1@3.531,-49.759 3.581,-49.809 3.581,-51.105 5.817,-53.34 8.687,-53.34 9.271,-52.756 9.271,-50.775 9.042,-50.546 IC1.5
  Bottom Layer w0.3: J1.3 2.946,-42.621 3.48,-43.155 3.48,-49.733 v1(3.658,-49.911)
NetIC2_1: IC2.1 J1.10 Rp1.2 | length 16.8
  Top Layer w0.254: IC2.1 10.551,-25.237 Rp1.2@11.659,-24.13
  Top Layer w0.3: J1.10@1.575,-24.587 2.438,-23.724 3.835,-23.724 5.791,-21.768 10.16,-21.768 Rp1.2@12.192,-23.8
NetIC2_2: IC2.2 J1.9 R16.2 | length 6.4
  Top Layer w0.3: R16.2@5.385,-26.949 6.883,-25.451 6.883,-24.79 7.087,-24.587 7.29,-24.587
  Top Layer w0.5: J1.9 1.702,-27.432 R16.2@4.724,-27.432
NetIC2_4: IC2.4 J1.7 R8.2 | length 17.7
  Top Layer w0.3: J1.7 1.778,-32.588 R8.2@5.08,-32.588 ; IC2.4@5.994,-23.952 5.994,-23.19 v1(6.096,-23.089)
  Bottom Layer w0.3: J1.7@1.829,-32.334 4.851,-32.334 6.502,-30.683 6.502,-23.216 6.375,-23.089 v1(6.096,-23.089)
NetIC2_5: IC2.5 J1.8 R9.2 | length 12.3
  Top Layer w0.3: J1.8@1.829,-30.15 1.956,-30.023 R9.2@4.826,-30.023 ; v1@4.674,-24.892 4.978,-24.587 IC2.5
  Bottom Layer w0.3: J1.8 3.912,-29.921 4.826,-29.007 v1(4.826,-24.638)
NetIC3_1: IC3.1 J1.5 R6.2 | length 26.3
  Top Layer w0.254: v1@6.579,-54.254 IC3.1@8.687,-54.254
  Top Layer w0.5: J1.5 1.778,-37.668 R6.2
  Bottom Layer w0.254: J1.5 5.512,-37.541 5.664,-37.694 5.664,-53.391 v1@6.566,-54.292
  other v1: 6.579,-54.28
NetIC3_2: IC3.2 J1.6 R7.2 | length 29.5
  Top Layer w0.254: J1.6@1.626,-35.23 1.778,-35.077 R7.2 ; v1@7.852,-54.915 IC3.2@8.687,-54.915
  Bottom Layer w0.254: J1.6 6.299,-35.001 7.391,-36.093 7.391,-51.308 7.874,-51.841 v1(7.874,-55.118)
NetJ2_1: J2.1 R18.2 | length 4.5
  Top Layer w0.4: J2.1 7.934,-19.695 R18.2
NetJ2_2: J2.2 U2.16 | length 11.5
  Top Layer w0.4: J2.2 5.093,-16.739 14.326,-16.739 14.672,-16.392 U2.16
NetJ2_3: J2.3 U2.15 | length 9.5
  Top Layer w0.4: J2.3 4.933,-15.195 5.359,-15.621 13.894,-15.621 U2.15@13.945,-15.672
NetR4_1: R4.1 U1.52 | length 4.8
  Top Layer w0.254: U1.52 34.102,-37.857 35.103,-36.855 R4.1
NetR10_2: R10.2 U1.42 | length 6.4
  Top Layer w0.254: U1.42 40.688,-45.351 R10.2
NetR11_2: R11.2 U1.44 | length 5.9
  Top Layer w0.254: U1.44 40.77,-44.351 41.631,-45.212 42.794,-45.212 R11.2
NetR12_2: R12.2 U1.45 | length 5.8
  Top Layer w0.254: U1.45 40.858,-43.851 41.656,-43.053 42.88,-43.053 R12.2
NetR13_2: R13.2 U1.46 | length 6.5
  Top Layer w0.254: U1.46 40.378,-43.351 R13.2
NetR14_2: R14.2 U1.35 U1.36 | length 5.9
  Top Layer w0.254: U1.36 U1.35 41.739,-48.851 R14.2@42.52,-49.632
NetR15_2: R15.2 U1.60 | length 8.8
  Top Layer w0.254: R15.2@24.181,-35.585 26.064,-37.468 28.393,-37.468 30.102,-39.176 U1.60
NetR17_1: R17.1 U1.62 | length 16.3
  Top Layer w0.254: R17.1@15.469,-35.721 18.124,-38.376 28.017,-38.376 29.102,-39.461 U1.62
NetR18_1: R18.1 R19.2 U2.19 | length 10
  Top Layer w0.4: R18.1@11.252,-20.65 11.303,-20.599 R19.2 16.622,-19.395 U2.19
PGC: MCU1.15 P1.5 | length 18.4
  Top Layer w0.254: v1@30.429,-11.278 30.456,-11.304 MCU1.15@30.456,-12.509
  Bottom Layer w0.254: v1@30.48,-11.227 37.019,-11.227 43.699,-4.547 P1.5
  other v1: 30.429,-11.074
PGD: MCU1.16 P1.4 | length 19.6
  Top Layer w0.254: v1@28.753,-12.065 29.197,-12.509 MCU1.16@29.956,-12.509
  Bottom Layer w0.254: v1@28.727,-12.167 28.88,-12.014 36.881,-12.014 41.808,-7.087 P1.4
  other v1: 28.727,-12.04
SCK: MCU1.50 U1.40 | length 29.1
  Top Layer w0.254: U1.40@37.948,-46.355 v1@39.438,-46.355 ; MCU1.50@39.04,-21.285 40.234,-21.285 41.51,-22.562 v1(41.51,-23.444)
  Bottom Layer w0.254: v1(39.446,-46.533) 39.446,-41.427 41.51,-39.364 v1@41.51,-23.647
U1CTS: MCU1.30 U2.11 | length 22.4
  Top Layer w0.254: U2.11 15.972,-10.232 v1@16.231,-10.49 ; v1@26.467,-21.133 26.79,-20.809 MCU1.30@28.156,-20.809
  Bottom Layer w0.254: v1(16.205,-10.465) 16.205,-17.602 19.71,-21.107 v1(26.441,-21.107)
U1RTS: MCU1.29 U2.3 | length 15.3
  Top Layer w0.254: U2.3 21.172,-10.631 v1@21.742,-11.201 ; v1@26.645,-20.015 26.939,-20.309 MCU1.29@28.156,-20.309
  Bottom Layer w0.254: v1(21.666,-10.973) 21.692,-10.973 26.619,-15.9 v1@26.619,-20.015
  other v1: 26.619,-19.99
U1RX: MCU1.23 U2.5 | length 14.2
  Top Layer w0.254: U2.5@19.847,-8.966 19.847,-11.084 23.52,-14.757 23.52,-16.662 v1@23.952,-17.094 ; v1@25.959,-16.993 26.276,-17.309 MCU1.23@28.156,-17.309
  Bottom Layer w0.254: v1(23.927,-17.069) 24.028,-16.967 v1(25.933,-16.967)
U1TX: MCU1.13 U2.1 | length 11.7
  Top Layer w0.254: U2.1 22.472,-9.874 22.962,-10.363 30.836,-10.363 31.471,-10.998 31.471,-12.243 MCU1.13@31.479,-12.251
pads on no net: IC1.6 IC2.6 IC3.4 IC3.5 IC3.6 J2.0 MCU1.1 MCU1.2 MCU1.3 MCU1.4 MCU1.5 MCU1.6 MCU1.8 MCU1.11 MCU1.12 MCU1.14 MCU1.17 MCU1.18 MCU1.21 MCU1.22 MCU1.24 MCU1.27 MCU1.28 MCU1.31 MCU1.32 MCU1.33 MCU1.34 MCU1.36 MCU1.37 MCU1.42 MCU1.43 MCU1.44 MCU1.45 MCU1.46 MCU1.47 MCU1.48 MCU1.53 MCU1.54 MCU1.55 MCU1.58 MCU1.59 MCU1.60 MCU1.61 MCU1.62 MCU1.64 P1.6 PS1.3 PS1.4 PS2.3 PS2.4 U1.18 U1.27 U1.29 U1.37 U1.64 U2.2 U2.6 U2.8 U2.9 U2.10 U2.12 U2.13 U2.14 U2.22 U2.23 U2.24 U2.27 U2.28
copper on no net:
  other v3: 44.628,-55.855 2.54,-55.829 3,-3 38.862,-2.54

## Polygon pours and split planes (outlines as drawn)
GND on Top Layer "A" (hatched 90Degree grid 0.254 track 0.254, remove dead copper): 0,0 47.092,0 47.092,-58.166 0,-58.166
GND on Bottom Layer "A" (hatched 90Degree grid 0.254 track 0.254, remove dead copper): 0,-58.166 0,0 47.092,0 47.092,-58.166

## Keep-outs
Keep-Out Layer:
  lines w0.254: 0,-58.166 47.092,-58.166 47.092,0 0,0 0,-58.166

## Other copper
Top Layer:
  pour cut-out: 27.356,-25.654 27.381,-25.629 39.726,-25.629 39.726,-30.201 39.802,-30.277 39.776,-30.302 27.356,-30.302
Bottom Layer:
  pour cut-out: 27.356,-25.654 27.381,-25.629 39.726,-25.629 39.726,-30.201 39.802,-30.277 39.776,-30.302 27.356,-30.302

## Text inside footprints (layer, text, board x,y; h text height)
2: Top Overlay "+" at 32.36,-2.667 h1.15